# Altium PCB PCB.PcbDoc
Units mil, origin at the board's own origin, x right, y up, seen from the top; angles counter-clockwise.
Board outline 3149.61 x 1181.1 mil, 2 copper layers (Top Layer, Bottom Layer); 24 components, 17 nets, 77 pads, 0 vias.
Unrouted connection lines stored in the file: 47.
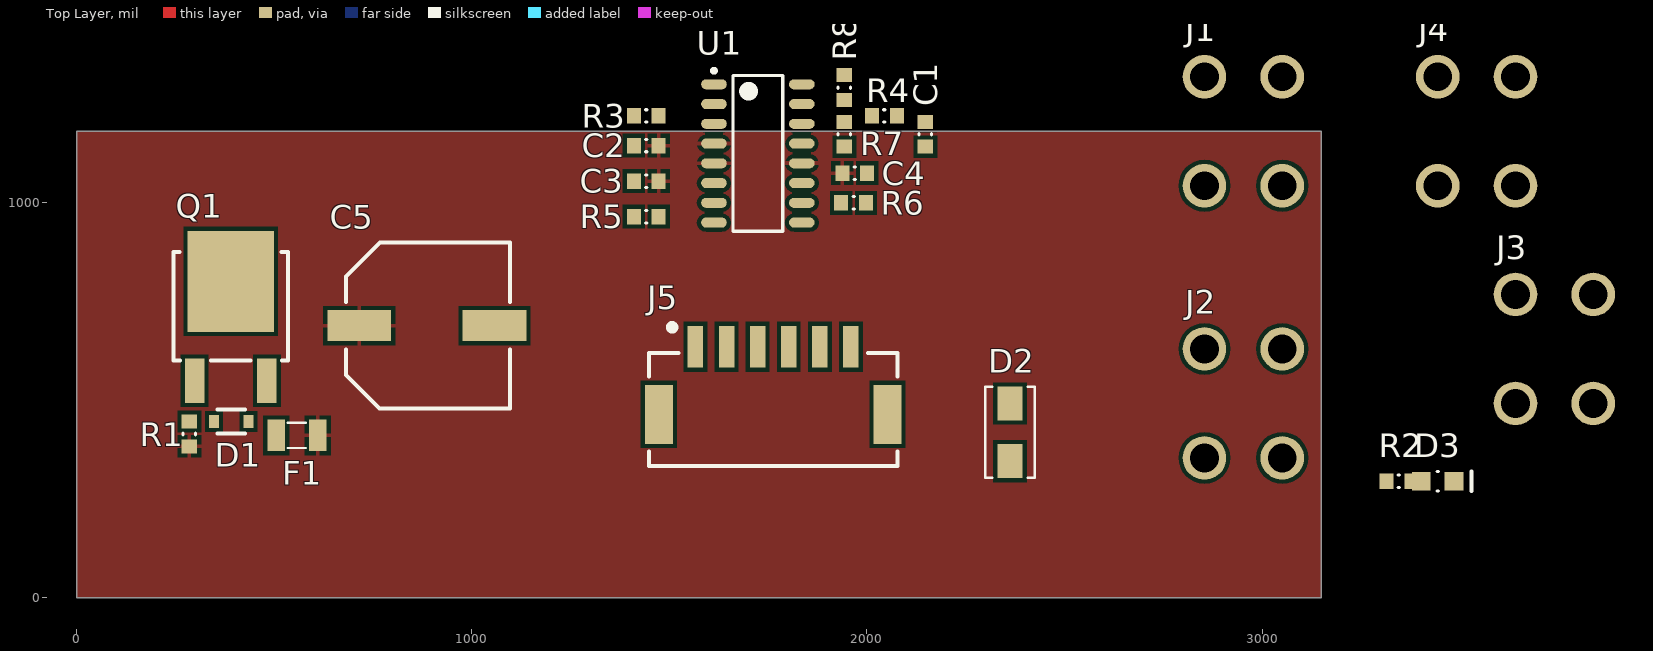
[diagram p0: Top Layer view]
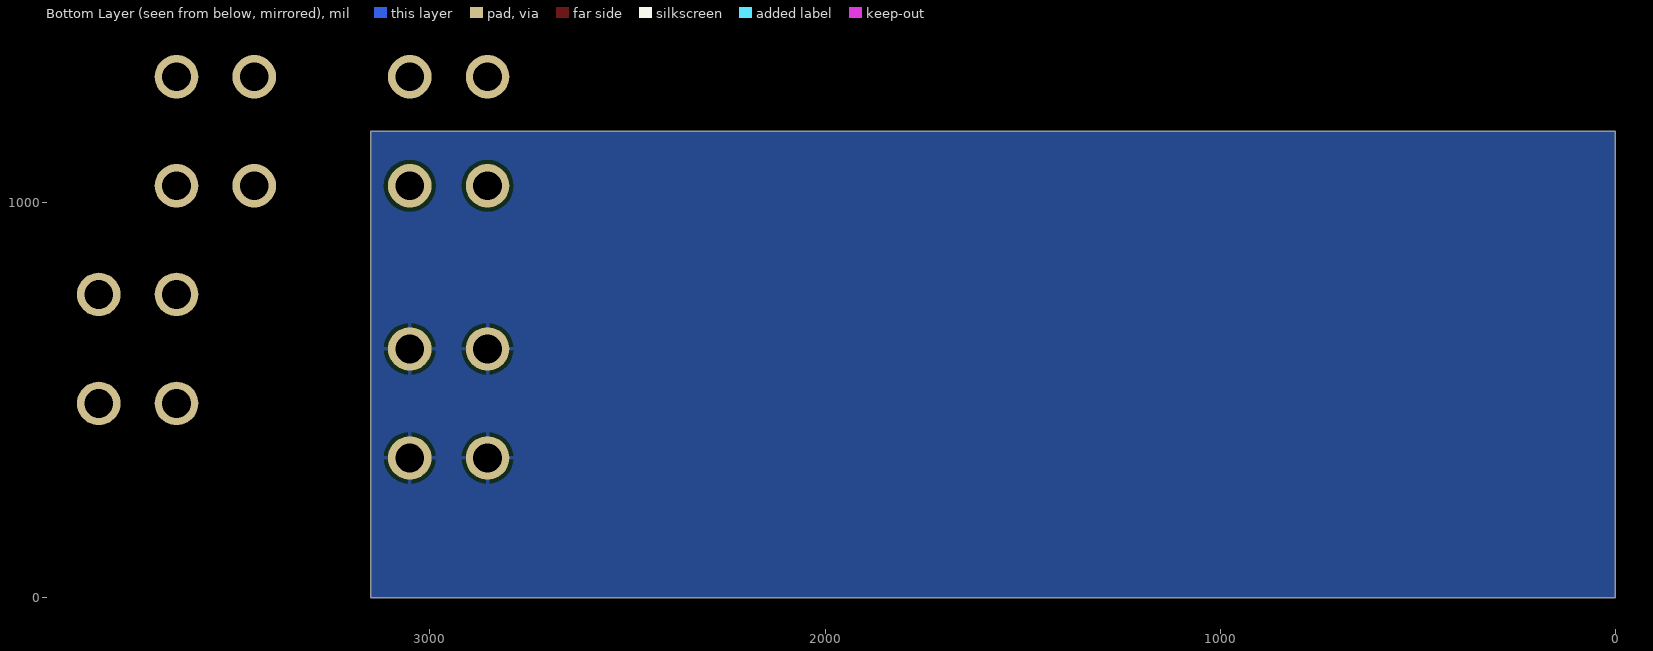
[diagram p1: Bottom Layer view, seen from below]

## Layer stack, top to bottom
Top Solder: solder mask 0.4, Solder Resist, Dk 3.5
Top Layer: signal copper 1.4
Dielectric 1: dielectric 12.6, FR-4, Dk 4.8
Bottom Layer: signal copper 1.4
Bottom Solder: solder mask 0.4, Solder Resist, Dk 3.5

## Board outline
0,1181.1 3149.61,1181.1 3149.61,0 0,0

## Design rules (kind name [scope] priority, off if disabled: settings)
Clearance [All] p1: gap=10 ignorepadtopadclearanceinfootprint=FALSE except(0: Arc-Hole Track-Hole SMDPad-Hole THPad-Hole Via-Hole Fill-Hole Poly-Hole Region-Hole Text-Hole)
PolygonConnect [All] p1: connectstyle=Relief reliefconductorwidth=10 reliefentries=4 polygonreliefangle="90 Angle" airgapwidth=10
RoutingVias [All] p1: holewidth=28 width=50 viastyle="Through Hole" minholewidth=28 minwidth=50 maxholewidth=28 maxwidth=50
SolderMaskExpansion [All] p1: expansion=4 istentingtop=FALSE
Width [All] p1: maxlimit=10 minlimit=10 preferedwidth=10
30 further rules are at their usual default settings.

## Components (designator, comment, footprint, x,y, rotation, side; value= is the part's Value field where it differs from the comment)
C1 "CAP_10nF_0603" CAPC0603(1608)55_N 2147.56,1173.43 r90 top value=10nF
C2 "CAP_0.1uF_50V_0603" CAPC0603(1608)55_N 1441.06,1144.92 r0 top value=0.1uF
C3 "CAP_0.1uF_50V_0603" CAPC0603(1608)55_N 1441.06,1054.92 r0 top value=0.1uF
C4 "CAP_0.1uF_50V_0603" CAPC0603(1608)55_N 1969.06,1074.92 r0 top value=0.1uF
C5 "CAP_270uF_50V_ALUM" RADIAL_PANASONIC_G 885.83,688.98 r270 top
D1 "DIO_ZENER_15V" SOD-323 390.51,446.22 r0 top
D2 "TVS_DIODE_BIDIR_12.8V" TVS_DIODE_BIDIR_DO-214AC_SMA 2362.2,419.01 r90 top
D3 "DIO_LED_G" LED_0805_LINE 3444.88,295.28 r0 top
F1 "FUSE_20A_1206" FUSE_1206 556.91,411.22 r0 top
J1 "Screw Terminal 6-32" 7701_KEYSTONE 2952.76,1181.1 r0 top
J2 "Screw Terminal 6-32" 7701_KEYSTONE 2952.76,492.13 r0 top
J3 "Screw Terminal 6-32" 7701_KEYSTONE 3740.16,630.12 r0 top
J4 "Screw Terminal 6-32" 7701_KEYSTONE 3543.31,1181.1 r0 top
J5 "CON_6M_SM_RA" MOLEX-5024940670 1762.56,549.92 r0 top
Q1 "PMOS_40V_8.4A" D-PAK 389.41,675.24 r0 top
R1 "1.1K 1%" RESC0603(1608)_N 284.41,414.72 r270 top value=1K1
R2 "RES_680R_0603" RESC0603(1608)_N 3346.46,295.28 r0 top
R3 "RES_680R_0603" RESC0603(1608)_N 1441.06,1219.92 r0 top
R4 "RES_10K_0603" RESC0603(1608)_N 2044.06,1219.92 r0 top value=10K
R5 "RES_680R_0603" RESC0603(1608)_N 1441.06,964.92 r0 top
R6 "RES_680R_0603" RESC0603(1608)_N 1966.06,999.92 r180 top
R7 "RES_680R_0603" RESC0603(1608)_N 1942.56,1173.43 r90 top
R8 "RES_680R_0603" RESC0603(1608)_N 1942.56,1291.42 r270 top
U1 "IC_MOTOR_DRIVER_ST" SO-16N 1723.78,1124.92 r0 top

## Footprints (in the part's own frame and the unit in brackets; to place one, negate y for a bottom-side part, rotate by r counter-clockwise, add the part's x,y. Pads: shape width x height; smd on the part's side, far side on the other; paste and mask are expansions set on the pad)
7701_KEYSTONE [mm] "Through hole screw terminal footprint"
  round 2.8 hole 1.85: 1(-2.5,-3.505) 1(-2.5,3.505) 1(2.5,-3.505) 1(2.5,3.505)
  body extent -4.01,-4.64 3.99,4.49, height 8.2
CAPC0603(1608)55_N [mm] "Chip Capacitor, Body 1.6x0.8mm, Height 0.55mm, IPC Medium Density"
  rect 0.9x1 smd: 1(-0.8,0) 2(0.8,0)
  silkscreen extent -0.05,-0.4 0.05,0.4, body extent -0.87,-0.48 0.88,0.47, height 0.55
D-PAK [mm] "TO-252AA"
  rect 5.55x6.5 smd: 1(0,3.2)
  rect 1.25x2.85 smd: 2(-2.325,-3.2) 3(2.325,-3.2)
  silkscreen extent -3.68,-1.91 3.68,5.08, body extent -3.27,-4.08 3.27,5.8, height 2.64
FUSE_1206 [mil]
  rect 45x80 smd mask+1: 1(-52.5,0) 2(52.5,0)
  silkscreen extent -23,-32 22,32, body extent -65,-32 65,32, height 32
LED_0805_LINE [mm] "SMD, 2-Leads, Body 2x1.25mm"
  rect 1.2x1.2 smd: 1(-1.05,0) 2(1.05,0)
  silkscreen extent -0.05,-0.64 2.16,0.64, body extent -1,-0.63 1,0.63, height 0.8
MOLEX-5024940670 [mm] "Molex 5024940670 6 pin 2mm pitch SMD RA connector"
  rect 1.8x3.8 smd: 0(-7.35,-2.175) 0(7.35,-2.175)
  rect 1x2.7 smd: 1(-5,2.175) 2(-3,2.175) 3(-1,2.175) 4(1,2.175) 5(3,2.175) 6(5,2.175)
  silkscreen extent -8,-5.49 8,3.62, body extent -8,-5.49 8,3.01, height 6.91
RADIAL_PANASONIC_G [mm] "Size G radial surface mount capacitor"
  rect 2x4.1 smd: 1(0,-4.35) 2(0,4.35)
  silkscreen extent -5.33,-5.21 5.33,5.33, body extent -5.15,-5.8 5.15,5.8, height 10.21
RESC0603(1608)_N [mm] "Chip Resistor, Body 1.6x0.8mm, IPC Medium Density"
  rect 0.9x1 smd: 1(-0.8,0) 2(0.8,0)
  silkscreen extent -0.05,-0.4 0.05,0.4, body extent -0.85,-0.47 0.85,0.47, height 0.6
SO-16N [mm]
  oval 1.65x0.65 smd: 1(-2.825,4.445) 2(-2.825,3.175) 3(-2.825,1.905) 4(-2.825,0.635) 5(-2.825,-0.635) 6(-2.825,-1.905) 7(-2.825,-3.175) 8(-2.825,-4.445) 9(2.825,-4.445) 10(2.825,-3.175) 11(2.825,-1.905) 12(2.825,-0.635) 13(2.825,0.635) 14(2.825,1.905) 15(2.825,3.175) 16(2.825,4.445)
  silkscreen extent -2.95,-5 1.6,5.44, body extent -3,-5 3,5, height 1.75
SOD-323 [mm]
  rect 0.63x0.83 smd: 1(-1.115,0) 2(1.115,0)
  silkscreen extent -0.9,-0.76 0.9,0.76, body extent -1.24,-0.62 1.24,0.62, height 1.1
TVS_DIODE_BIDIR_DO-214AC_SMA [mm]
  rect 2.18x1.63 smd: 1(-1.857,0) 2(1.857,0)
  silkscreen extent -2.92,-1.59 2.92,1.59, body extent -2.6,-1.3 2.6,1.3, height 2.38

## Part data
C1: "CAP CER 10000PF 16V X7R 0603", Manufacturer 1=Yageo, Manufacturer Part Number 1=CC0603KRX7R7BB103, Package="0603 (1608 Metric)", Supplier Part Number 1=311-3369-1-ND, Temperature Coefficient=X7R, Voltage Rating=16V, Dimensions="0.063\" L x 0.031\" W (1.60mm x 0.80mm)", Mount="Surface Mount", Supplier 1=Digi-Key
C2 C3 C4: "CAP CER 0.1UF 50V X7R 0603", Manufacturer 1=Yageo, Manufacturer Part Number 1=CC0603KRX7R9BB104, Package="0603 (1608 Metric)", Supplier Part Number 1=311-1344-1-ND, Temperature Coefficient=X7R, Voltage Rating=50V, Dimensions="0.063\" L x 0.031\" W (1.60mm x 0.80mm)", Mount="Surface Mount", Supplier 1=Digi-Key
C5: "CAP ALUM 270UF 20% 50V RADIAL", Capacitance=270uF, Case/Package=Radial, ESR (Equivalent Series Resistance)=180mR, Manufacturer 1=Panasonic, Manufacturer Part Number 1=EEEFK1H271SP, Max Operating Temperature=105°C, Min Operating Temperature=-55°C, Package Quantity=500, Ripple Current=435.5mA, Ripple Current (AC)=670mA, Supplier Part Number 1=P18967CT-ND, Tolerance=20%, Voltage Rating=50V, ComponentLink1Description=https://media.digikey.com/pdf/Data%20Sheets/Panasonic%20Capacitors%20PDFs/FKS_Series_Type_V.pdf?src-supplier=Digi-Key, ComponentLink1URL=https://media.digikey.com/pdf/Data%20Sheets/Panasonic%20Capacitors%20PDFs/FKS_Series_Type_V.pdf?src-supplier=Digi-Key, ComponentLink2Description=https://media.digikey.com/pdf/Data%20Sheets/Panasonic%20Capacitors%20PDFs/FKS-V_Series_NPI.pdf?src-supplier=Digi-Key, ComponentLink2URL=https://media.digikey.com/pdf/Data%20Sheets/Panasonic%20Capacitors%20PDFs/FKS-V_Series_NPI.pdf?src-supplier=Digi-Key, ComponentLink3Description=http://www.farnell.com/datasheets/2813662.pdf?src-supplier=Farnell, ComponentLink3URL=http://www.farnell.com/datasheets/2813662.pdf?src-supplier=Farnell, ComponentLink4Description=http://www.farnell.com/datasheets/1996420.pdf?src-supplier=Element14, ComponentLink4URL=http://www.farnell.com/datasheets/1996420.pdf?src-supplier=Element14, ComponentLink5Description=https://industrial.panasonic.com/cdbs/www-data/pdf/RDE0000/DME0000COL90.pdf?src-supplier=Digi-Key, ComponentLink5URL=https://industrial.panasonic.com/cdbs/www-data/pdf/RDE0000/DME0000COL90.pdf?src-supplier=Digi-Key, Diameter=10mm, Height=10.2mm, Height - Seated (Max)=0.413inch, Life (Hours)=2000Hour, Mount="Surface Mount", Packaging="Cut Tape", Polarity=Polar, Pricing 1="1=0.98000, 10=0.74800, 100=0.53500 (USD)", REACH SVHC=Unknown, RoHS=Yes, Stock 1=730, Supplier 1=Digi-Key, Voltage Rating (DC)=50V
D1: "DIODE ZENER 15V 300mW SMD SOD-323", Breakdown Voltage=15.8V, Case/Package=SOD-323-2, Forward Voltage=900mV, Manufacturer 1="ON Semiconductor", Manufacturer Part Number 1=MM3Z15VT1G, Max Operating Temperature=150°C, Max Power Dissipation=200mW, Max Reverse Leakage Current=50nA, Min Operating Temperature=-65°C, Package Quantity=3000, Supplier Part Number 1=MM3Z15VT1GOSCT-ND, Test Current=5mA, Tolerance=5%, Voltage Rating (DC)=15V, Zener Current=10mA, ComponentLink1Description=https://datasheet.ciiva.com/16292/mm3z12vst1g-16292931.pdf?src-supplier=Future+Electronics, ComponentLink1URL=https://datasheet.ciiva.com/16292/mm3z12vst1g-16292931.pdf?src-supplier=Future+Electronics, ComponentLink2Description=https://datasheet.ciiva.com/30478/0900766b8127c8bd-30478408.pdf?src-supplier=RSComponents, ComponentLink2URL=https://datasheet.ciiva.com/30478/0900766b8127c8bd-30478408.pdf?src-supplier=RSComponents, ComponentLink3Description=https://datasheet.ciiva.com/22626/1878251-22626885.pdf?src-supplier=Element14, ComponentLink3URL=https://datasheet.ciiva.com/22626/1878251-22626885.pdf?src-supplier=Element14, ComponentLink4Description=https://datasheet.ciiva.com/894/mm3z2v4st1-d-894651.pdf?src-supplier=Digi-Key, ComponentLink4URL=https://datasheet.ciiva.com/894/mm3z2v4st1-d-894651.pdf?src-supplier=Digi-Key, ComponentLink5Description=https://datasheet.ciiva.com/894/mm3z2v4st1-d-894649.pdf?src-supplier=Digi-Key, ComponentLink5URL=https://datasheet.ciiva.com/894/mm3z2v4st1-d-894649.pdf?src-supplier=Digi-Key, ComponentLink6Description=https://datasheet.ciiva.com/25928/mm3z2v4st1-d-25928489.pdf?src-supplier=Avnet+Europe, ComponentLink6URL=https://datasheet.ciiva.com/25928/mm3z2v4st1-d-25928489.pdf?src-supplier=Avnet+Europe, ComponentLink7Description=https://datasheet.ciiva.com/894/mm3z2v4st1-d-894650.pdf?src-supplier=Digi-Key, ComponentLink7URL=https://datasheet.ciiva.com/894/mm3z2v4st1-d-894650.pdf?src-supplier=Digi-Key, ComponentLink8Description=https://datasheet.ciiva.com/18434/70100601-18434790.pdf?src-supplier=Allied+Electronics, ComponentLink8URL=https://datasheet.ciiva.com/18434/70100601-18434790.pdf?src-supplier=Allied+Electronics, ComponentLink9Description=https://datasheet.ciiva.com/8026/mm3z2v4t1-d-8026728.pdf?src-supplier=Element14, ComponentLink9URL=https://datasheet.ciiva.com/8026/mm3z2v4t1-d-8026728.pdf?src-supplier=Element14, ComponentLink10Description=https://datasheet.ciiva.com/22626/1876691-22626888.pdf?src-supplier=Element14, ComponentLink10URL=https://datasheet.ciiva.com/22626/1876691-22626888.pdf?src-supplier=Element14, ComponentLink11Description=https://datasheet.ciiva.com/894/mm3z2v4t1-d-894601.pdf?src-supplier=Digi-Key, ComponentLink11URL=https://datasheet.ciiva.com/894/mm3z2v4t1-d-894601.pdf?src-supplier=Digi-Key, ComponentLink12Description=https://datasheet.ciiva.com/10630/mm3z2v4t1-d-10630217.pdf?src-supplier=Avnet, ComponentLink12URL=https://datasheet.ciiva.com/10630/mm3z2v4t1-d-10630217.pdf?src-supplier=Avnet, ComponentLink13Description=https://datasheet.ciiva.com/894/mm3z2v4t1-d-894602.pdf?src-supplier=Digi-Key, ComponentLink13URL=https://datasheet.ciiva.com/894/mm3z2v4t1-d-894602.pdf?src-supplier=Digi-Key, ComponentLink14Description=https://datasheet.ciiva.com/894/mm3z2v4t1-d-894603.pdf?src-supplier=Digi-Key, ComponentLink14URL=https://datasheet.ciiva.com/894/mm3z2v4t1-d-894603.pdf?src-supplier=Digi-Key, Contact Plating=Tin,Matte, Element Configuration=Single, ESD Protection=Yes, Height=1mm, Impedance=30R, Lead Free="Lead Free", Length=1.8mm, Material=Plastic, Number of Pins=2, Packaging="Tape and Reel", Peak Reverse Current=50nA, Power Dissipation=200mW, Power Rating=200mW, Pricing 1="1=0.14000, 10=0.13000, 25=0.12360, 100=0.05450, 250=0.05228, 500=0.04276, 1000=0.02970 (USD)", Radiation Hardening=No, REACH SVHC="No SVHC", RoHS=Yes, Stock 1=57470, Supplier 1=Digi-Key, Voltage Tolerance=5%, Width=1.35mm, Working Voltage=15V, Zener Voltage=15V
D2: "TVS DIODE 12.8V 21.2V SMA", Breakdown Voltage=15.8V, Case/Package=SMA, Clamping Voltage=21.2V, Leakage Current=1uA, Manufacturer 1="Vishay Semiconductors", Manufacturer Part Number 1=P4SMA15CA-E3/61, Max Operating Temperature=150°C, Max Surge Current=18.9A, Min Breakdown Voltage=14.3V, Min Operating Temperature=-65°C, Operating Supply Voltage=12.8V, Package Quantity=1800, Peak Pulse Power=400W, Power Line Protection=No, Supplier Part Number 1=P4SMA15CA-E3/61GICT-ND, Test Current=1mA, ComponentLink1Description=https://datasheet.ciiva.com/344/p4sma-344213.pdf?src-supplier=Digi-Key, ComponentLink1URL=https://datasheet.ciiva.com/344/p4sma-344213.pdf?src-supplier=Digi-Key, ComponentLink2Description=https://datasheet.ciiva.com/26212/p4sma-26212614.pdf?src-supplier=Avnet+Europe, ComponentLink2URL=https://datasheet.ciiva.com/26212/p4sma-26212614.pdf?src-supplier=Avnet+Europe, Composition=Zener, Direction=Bidirectional, Element Configuration=Single, Max Reverse Leakage Current=1uA, Mount="Surface Mount", Number of Bidirectional Channels=1, Number of Channels=1, Number of Elements=1, Number of Pins=2, Packaging="Tape and Reel", Peak Pulse Current=18.9A, Polarity=Bidirectional, Pricing 1="1=0.38000, 10=0.31000, 25=0.28400, 100=0.17820, 250=0.17624, 500=0.16500 (USD)", Radiation Hardening=No, Reverse Breakdown Voltage=14.3V, Reverse Standoff Voltage=12.8V, RoHS=Yes, Stock 1=5900, Supplier 1=Digi-Key, Termination=SMD/SMT
D3: "LED GREEN DIFFUSED 0805 SMD", Forward Voltage Drop=2.2V, Manufacturer=OSRAM, MPN="LG R971-KN-1", Package="0805 (2012 Metric)", Supplier Part Number 1=475-1410-1-ND, Supplier 1=Digi-Key
F1: Case Code (Imperial)=1206, Case Code (Metric)=3216, Current Rating=20A, DC Cold Resistance=2mR, Manufacturer 1=Littelfuse, Manufacturer Part Number 1=0501020.WR, Max Operating Temperature=150°C, Min Operating Temperature=-55°C, Package Quantity=3000, Power Dissipation=1.1871W, Supplier Part Number 1=F2920CT-ND, Voltage Rating=32V, Voltage Rating (DC)=24V, Approvals=UL,CSA, Body Material=Ceramic, Case/Package=1206, ComponentLink1Description=https://datasheet.ciiva.com/3813/2da-3813990.pdf?src-supplier=Arrow, ComponentLink1URL=https://datasheet.ciiva.com/3813/2da-3813990.pdf?src-supplier=Arrow, ComponentLink2Description=https://datasheet.ciiva.com/1730/714013-1730635.pdf?src-supplier=Newark, ComponentLink2URL=https://datasheet.ciiva.com/1730/714013-1730635.pdf?src-supplier=Newark, ComponentLink3Description=https://datasheet.ciiva.com/46394/714013-46394876.pdf?src-supplier=Element14, ComponentLink3URL=https://datasheet.ciiva.com/46394/714013-46394876.pdf?src-supplier=Element14, ComponentLink4Description=https://datasheet.ciiva.com/299/littelfuse-fuse-501-series-299426.pdf?src-supplier=Digi-Key, ComponentLink4URL=https://datasheet.ciiva.com/299/littelfuse-fuse-501-series-299426.pdf?src-supplier=Digi-Key, ComponentLink5Description=https://datasheet.ciiva.com/299/littelfuse-fuse-501-series-299427.pdf?src-supplier=Digi-Key, ComponentLink5URL=https://datasheet.ciiva.com/299/littelfuse-fuse-501-series-299427.pdf?src-supplier=Digi-Key, ComponentLink6Description=https://datasheet.ciiva.com/299/littelfuse-fuse-501-series-299428.pdf?src-supplier=Digi-Key, ComponentLink6URL=https://datasheet.ciiva.com/299/littelfuse-fuse-501-series-299428.pdf?src-supplier=Digi-Key, Depth=1.63mm, Fuse Current=20A, Fuse Type="Board Mount (Cartridge Style Excluded)", Height=0.033inch, Housing Material=Ceramic, Lead Free="Lead Free", Length=3.2mm, Mount="Surface Mount", Packaging="Tape and Reel", Pricing 1="1=0.96000, 5=0.93000, 10=0.87100, 50=0.72080, 100=0.60060, 250=0.58560, 500=0.49550, 1000=0.43544 (USD)", REACH SVHC="No SVHC", Resistance=2mR, RoHS=Yes, Stock 1=4551, Supplier 1=Digi-Key, Termination=SMD/SMT, Width=0.064inch, Working Voltage=24V
J1 J2 J3 J4: library part SCREW_TERMINAL_1_POS_6_32, "TERM W/ASSEMBLD SCREW VERT PCMNT", Color=Silver, Current Rating=15A, Manufacturer 1="Keystone Electronics", Manufacturer Part Number 1=7701, Package Quantity=100, Supplier Part Number 1=36-7701-ND, ComponentLink1Description=https://datasheet.ciiva.com/13540/7701-289575-13540237.pdf?src-supplier=Mouser, ComponentLink1URL=https://datasheet.ciiva.com/13540/7701-289575-13540237.pdf?src-supplier=Mouser, ComponentLink2Description=https://datasheet.ciiva.com/16391/m60-2p62-16391562.pdf?src-supplier=Future+Electronics, ComponentLink2URL=https://datasheet.ciiva.com/16391/m60-2p62-16391562.pdf?src-supplier=Future+Electronics, ComponentLink3Description=https://datasheet.ciiva.com/14550/70181561-14550854.pdf?src-supplier=Allied+Electronics, ComponentLink3URL=https://datasheet.ciiva.com/14550/70181561-14550854.pdf?src-supplier=Allied+Electronics, Contact Material=Brass, Contact Plating=Tin,Nickel, Depth=7.87mm, Diameter=0.31inch, Gender=Male, Height=0.44inch, Insulation=Non-Insulated, Lead Free="Lead Free", Length=7.87mm, Material=Brass,Tin, Max Current Rating=15A, Mount="Through Hole", Number of Contacts=1, Number of Pins=4, Number of Ports=1, Number of Terminals=4, Orientation=Straight, Packaging=Box, Pricing 1="1=0.57000, 25=0.47960, 100=0.40850, 250=0.38256, 500=0.35520, 1000=0.29820, 2500=0.26640 (USD)", REACH SVHC="No SVHC", RoHS=Yes, Stock 1=15600, Supplier 1=Digi-Key, Terminal Material=Brass, Termination=Solder
J5: "CONN HEADER SMD RIGHT ANGLE 2MM PITCH", Color=Natural, Current Rating=3A, Flammability Rating="UL94 V-0", Insulation Resistance=1GR, Manufacturer 1=Molex, Manufacturer Part Number 1=502494-0670, Max Operating Temperature=85°C, Max Voltage Rating (AC)=250V, Min Operating Temperature=-25°C, Package Quantity=950, Supplier Part Number 1=WM2283CT-ND, ComponentLink1Description=https://datasheet.ciiva.com/755/5024940670-sd-755844.pdf?src-supplier=Digi-Key, ComponentLink1URL=https://datasheet.ciiva.com/755/5024940670-sd-755844.pdf?src-supplier=Digi-Key, ComponentLink2Description=https://datasheet.ciiva.com/24467/101355024940670-pcb-receptacles-24467588.pdf?src-supplier=Onlinecomponents.com, ComponentLink2URL=https://datasheet.ciiva.com/24467/101355024940670-pcb-receptacles-24467588.pdf?src-supplier=Onlinecomponents.com, ComponentLink3Description=https://datasheet.ciiva.com/16656/5024940670-pcb-receptacles-16656439.pdf?src-supplier=Avnet+Europe, ComponentLink3URL=https://datasheet.ciiva.com/16656/5024940670-pcb-receptacles-16656439.pdf?src-supplier=Avnet+Europe, ComponentLink4Description=https://datasheet.ciiva.com/7436/1630854-7436283.pdf?src-supplier=Newark, ComponentLink4URL=https://datasheet.ciiva.com/7436/1630854-7436283.pdf?src-supplier=Newark, ComponentLink5Description=https://datasheet.ciiva.com/5157/5024940670-pcb-receptacles-179322-5157180.pdf?src-supplier=Mouser, ComponentLink5URL=https://datasheet.ciiva.com/5157/5024940670-pcb-receptacles-179322-5157180.pdf?src-supplier=Mouser, ComponentLink6Description=https://datasheet.ciiva.com/7917/1630854-7917014.pdf?src-supplier=Element14, ComponentLink6URL=https://datasheet.ciiva.com/7917/1630854-7917014.pdf?src-supplier=Element14, ComponentLink7Description=https://datasheet.ciiva.com/30242/101355024940670-pcb-receptacles-30242550.pdf?src-supplier=Onlinecomponents.com, ComponentLink7URL=https://datasheet.ciiva.com/30242/101355024940670-pcb-receptacles-30242550.pdf?src-supplier=Onlinecomponents.com, ComponentLink8Description=https://datasheet.ciiva.com/755/5024940670-sd-755789.pdf?src-supplier=Digi-Key, ComponentLink8URL=https://datasheet.ciiva.com/755/5024940670-sd-755789.pdf?src-supplier=Digi-Key, Connector Type=Receptacle,Forked, Contact Gender=Female, Contact Material="Copper Alloy", Contact Plating=Tin, Depth=6.85mm, Fastening Type=Latch, Gender=Receptacle, Glow Wire Compliant=Non-compliant, Housing Color=Natural, Housing Material=PBT, Length=16mm, Material=Polybutylene, Max Voltage Rating (DC)=250V, Mount="Surface Mount", Number of Circuits=6, Number of Contacts=6, Number of Positions=6, Number of Rows=1, Orientation="Right Angle", Packaging="Tape and Reel", Pitch=2mm, Pricing 1="1=0.81000, 10=0.70800, 25=0.66680, 50=0.63880, 100=0.61110, 250=0.55552 (USD)", Radiation Hardening=No, REACH SVHC=Unknown, RoHS=Yes, Stock 1=7093, Supplier 1=Digi-Key, Termination=Solder, Voltage Rating=250V
Q1: "MOSFET P-CH 40V 8.4A D-PAK", Case/Package=TO-252, Continuous Drain Current (ID)=8.4A, Current Rating=-8.4A, Drain to Source Breakdown Voltage=-40V, Drain to Source Resistance=27mR, Drain to Source Voltage (Vdss)=40V, Gate to Source Voltage (Vgs)=20V, Input Capacitance=2.38nF, Manufacturer 1="ON Semiconductor / Fairchild", Manufacturer Part Number 1=FDD4685, Max Operating Temperature=150°C, Max Power Dissipation=69W, Min Operating Temperature=-55°C, On-State Resistance=27MR, Package Quantity=2500, Supplier Part Number 1=FDD4685CT-ND, Threshold Voltage=-1.6V, ComponentLink1Description=https://datasheet.ciiva.com/6382/fdd4685-6382336.pdf?src-supplier=Digi-Key, ComponentLink1URL=https://datasheet.ciiva.com/6382/fdd4685-6382336.pdf?src-supplier=Digi-Key, ComponentLink2Description=https://datasheet.ciiva.com/22700/298848-22700881.pdf?src-supplier=Element14, ComponentLink2URL=https://datasheet.ciiva.com/22700/298848-22700881.pdf?src-supplier=Element14, ComponentLink3Description=https://datasheet.ciiva.com/4439/fdd4685-94891-4439978.pdf?src-supplier=Mouser, ComponentLink3URL=https://datasheet.ciiva.com/4439/fdd4685-94891-4439978.pdf?src-supplier=Mouser, ComponentLink4Description=https://datasheet.ciiva.com/7967/298848-7967879.pdf?src-supplier=Element14, ComponentLink4URL=https://datasheet.ciiva.com/7967/298848-7967879.pdf?src-supplier=Element14, ComponentLink5Description=https://datasheet.ciiva.com/26144/fdd4685-26144727.pdf?src-supplier=Avnet+Europe, ComponentLink5URL=https://datasheet.ciiva.com/26144/fdd4685-26144727.pdf?src-supplier=Avnet+Europe, ComponentLink6Description=https://datasheet.ciiva.com/22746/1930081-22746458.pdf?src-supplier=Element14, ComponentLink6URL=https://datasheet.ciiva.com/22746/1930081-22746458.pdf?src-supplier=Element14, ComponentLink7Description=https://datasheet.ciiva.com/22655/1930081-22655292.pdf?src-supplier=Element14, ComponentLink7URL=https://datasheet.ciiva.com/22655/1930081-22655292.pdf?src-supplier=Element14, ComponentLink8Description=https://datasheet.ciiva.com/16742/fdd4685-16742918.pdf?src-supplier=Future+Electronics, ComponentLink8URL=https://datasheet.ciiva.com/16742/fdd4685-16742918.pdf?src-supplier=Future+Electronics, ComponentLink9Description=https://datasheet.ciiva.com/11175/fdd4685-11175308.pdf?src-supplier=Avnet, ComponentLink9URL=https://datasheet.ciiva.com/11175/fdd4685-11175308.pdf?src-supplier=Avnet, Contact Plating=Tin,Matte, Dual Supply Voltage=-40V, Element Configuration=Single, Fall Time=14ns, Height=2.39mm, Lead Free="Lead Free", Length=6.73mm, Mount="Surface Mount", Nominal Vgs=-1.6V, Number of Elements=1, Number of Pins=3, Packaging="Tape and Reel", Power Dissipation=69W, Pricing 1="1=1.03000, 10=0.92200, 25=0.87560, 100=0.65670, 250=0.65040, 500=0.55660, 1000=0.45342 (USD)", Radiation Hardening=No, Rds On Max=27mR, REACH SVHC="No SVHC", Rise Time=15ns, RoHS=Yes, Stock 1=9732, Supplier 1=Digi-Key, Termination=SMD/SMT, Turn-Off Delay Time=34ns, Turn-On Delay Time=8ns, Voltage Rating (DC)=-40V, Weight=0.26037g, Width=6.22mm
R1: library part RES_1K1_0603, "RES SMD 1.1K OHM 1% 1/10W 0603", Manufacturer 1=Yageo, Manufacturer Part Number=RC0603FR-071K1L, Package="0603 (1608 Metric)", Supplier Part Number 1=311-1.10KHRCT-ND, Tolerance=1%, Dimensions="0.063\" L x 0.031\" W (1.60mm x 0.80mm)", Mount="Surface Mount", Supplier 1=Digi-Key
R2 R3 R5 R6 R7 R8: "RES SMD 680 OHM 5% 0.1W 0603", Case Code (Imperial)=0603, Case Code (Metric)=1608, Manufacturer 1=Yageo, Manufacturer Part Number 1=AC0603JR-07680RL, Max Operating Temperature=155°C, Max Power Dissipation=100mW, Min Operating Temperature=-55°C, Package Quantity=1, Resistance=680R, Supplier Part Number 1=311-680LECT-ND, Temperature Coefficient=100ppm/°C, Tolerance=5%, Voltage Rating=50V, Case/Package=0603, ComponentLink1Description=http://www.yageo.com/documents/recent/PYu-AC_51_RoHS_L_2.pdf?src-supplier=Mouser, ComponentLink1URL=http://www.yageo.com/documents/recent/PYu-AC_51_RoHS_L_2.pdf?src-supplier=Mouser, ComponentLink2Description=http://www.yageo.com/documents/recent/PYu-AC_51_RoHS_L_2_revised.pdf?src-supplier=Avnet+Europe, ComponentLink2URL=http://www.yageo.com/documents/recent/PYu-AC_51_RoHS_L_2_revised.pdf?src-supplier=Avnet+Europe, ComponentLink3Description=http://www.yageo.com/NewPortal/yageodocoutput?fileName=/pdf/R-Chip/PYu-AC_51_RoHS_L_6.pdf&src-supplier=Digi-Key, ComponentLink3URL=http://www.yageo.com/NewPortal/yageodocoutput?fileName=/pdf/R-Chip/PYu-AC_51_RoHS_L_6.pdf&src-supplier=Digi-Key, Composition="Thick Film", Contact Plating=Tin,Matte, Features="Moisture Resistant,Automotive AEC-Q200,Anti-Sulfur", Height=0.022inch, Lead Free="Lead Free", Length=0.063inch, Number of Terminations=2, Packaging="Tape and Reel", Power Rating=100mW, Pricing 1="1=0.10000, 10=0.02300, 100=0.00940, 1000=0.00421, 2500=0.00366 (USD)", Radiation Hardening=No, RoHS=Yes, Stock 1=4680, Supplier 1=Digi-Key, Termination=SMD/SMT, Width=0.8mm
R4: "RES SMD 10K OHM 5% 1/10W 0603", Manufacturer 1=Yageo, Manufacturer Part Number 1=RC0603JR-0710KL, Package="0603 (1608 Metric)", Supplier Part Number 1=311-10KGRCT-ND, Tolerance=5%, Dimensions="0.063\" L x 0.031\" W (1.60mm x 0.80mm)", Mount="Surface Mount", Supplier 1=Digi-Key
U1: "IC H-BRIDGE MOTOR DRIVER 16-PINS STMicroelectronics VNH7070ASTR, SOIC", Case/Package=SOIC, Manufacturer 1=STMicroelectronics, Manufacturer Part Number 1=VNH7070ASTR, Max Operating Temperature=150°C, Min Operating Temperature=-40°C, Output Current=15A, Supplier Part Number 1=497-17630-1-ND, ComponentLink1Description=http://www.farnell.com/datasheets/2367755.pdf?src-supplier=Farnell, ComponentLink1URL=http://www.farnell.com/datasheets/2367755.pdf?src-supplier=Farnell, ComponentLink2Description=http://www.mouser.com/ds/2/389/vnh7070as-957633.pdf?src-supplier=Mouser, ComponentLink2URL=http://www.mouser.com/ds/2/389/vnh7070as-957633.pdf?src-supplier=Mouser, ComponentLink3Description=http://www.st.com/content/ccc/resource/sales_and_marketing/promotional_material/flyer/5d/08/7a/88/37/7b/43/7d/flm07hbrid.pdf/files/flm07hbrid.pdf/jcr:content/translations/en.flm07hbrid.pdf?src-supplier=Digi-Key, ComponentLink3URL=http://www.st.com/content/ccc/resource/sales_and_marketing/promotional_material/flyer/5d/08/7a/88/37/7b/43/7d/flm07hbrid.pdf/files/flm07hbrid.pdf/jcr:content/translations/en.flm07hbrid.pdf?src-supplier=Digi-Key, Interface=PWM, Lead Free="Lead Free", Logic Function=AND, Mount="Surface Mount", Number of Pins=16, Packaging="Tape and Reel", Pricing 1="1=3.49000, 10=3.13200, 25=2.96120, 100=2.43460, 250=2.18456, 500=2.10560, 1000=1.75028 (USD)", RoHS=No, Stock 1=2116, Supplier 1=Digi-Key

## Nets (pads, with @x,y where several pads share a name; then routed paths per layer and width w, separated by ;. In a path a pad name is that pad's centre, name@x,y a point inside that pad or via, vN(x,y) a via of type N, cw(c..) or ccw(c..) an arc to the next point about the centre after c; other vN are vias at no path point)
12V: D2.1 J1.1 Q1.1
12V_FUSED: C2.2 C3.2 C4.1 C5.1 F1.2 R1.2 U1.4 U1.5 U1.12
CURRENT_SENSE: C1.2 J5.5 R4.2
GND: C1.1 C2.1 C3.1 C4.2 C5.2 D2.2 D3.2 J2.1 J5.0 J5.6 R2.1 R7.1 U1.1 U1.8 U1.9 U1.16
INA: R3.2 U1.3
INA_R: J5.1 R3.1
INB: R5.2 U1.6
INB_R: J5.2 R5.1
NetD1_1: D1.1 Q1.2 R2.2
NetD1_2: D1.2 F1.1 Q1.3
NetR4_1: R4.1 R7.2 U1.13
OUTA: J3.1 U1.2 U1.15
OUTB: J4.1 U1.7 U1.10
PWM: R6.2 U1.11
PWM_R: J5.3 R6.1
SEL0: R8.2 U1.14
SEL0_R: J5.4 R8.1
pads on no net: D3.1 R1.1

## Polygon pours and split planes (outlines as drawn)
GND on Bottom Layer "GND_L02_P000" (solid, pour order 0): 0,0 0,1181.1 3149.61,1181.1 3149.61,0
12V_FUSED on Top Layer "12V_FUSED_L01_P001" (solid, pour order 1): 0,0 0,1181.1 3149.61,1181.1 3149.61,0